# Altium PCB RC_Transmit_PCB.PcbDoc
Units mm, origin at the board's own origin, x right, y up, seen from the top; angles counter-clockwise.
Board outline 152.4 x 101.6 mm, 2 copper layers (Top Layer, Bottom Layer); 31 components, 34 nets, 123 pads, 18 vias.
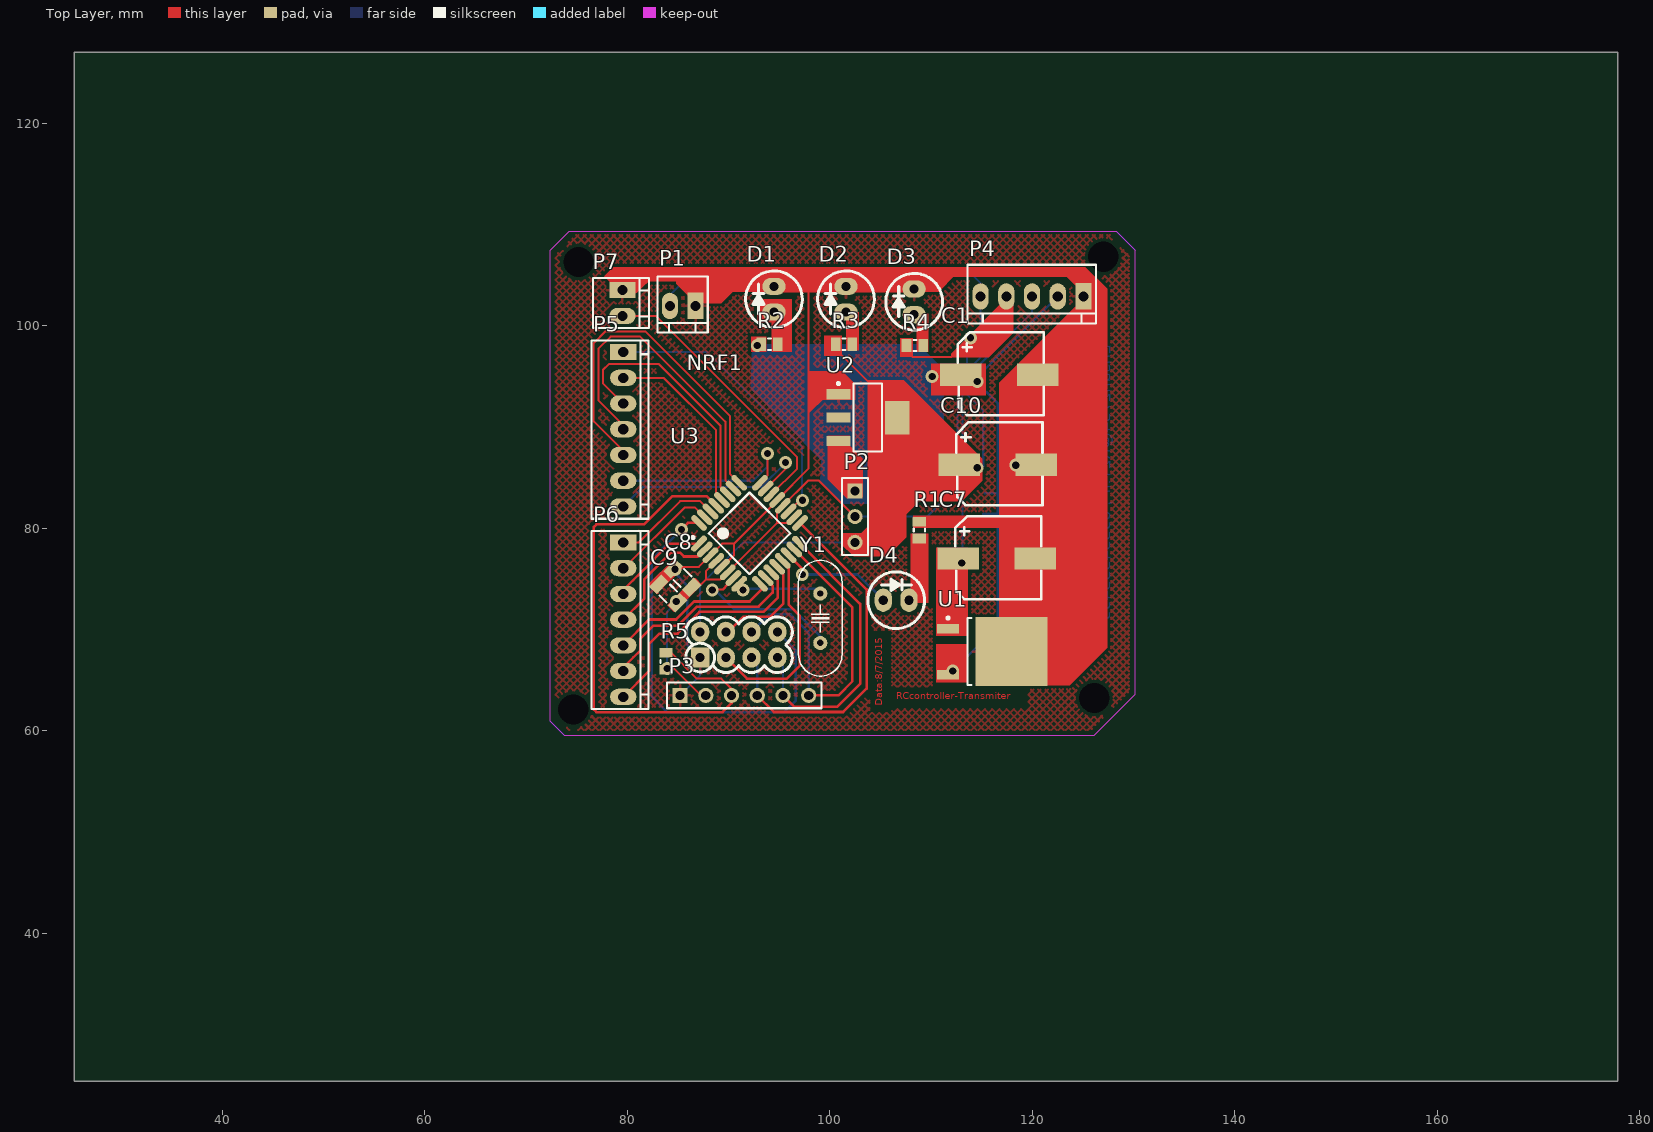
[diagram p0: Top Layer view]
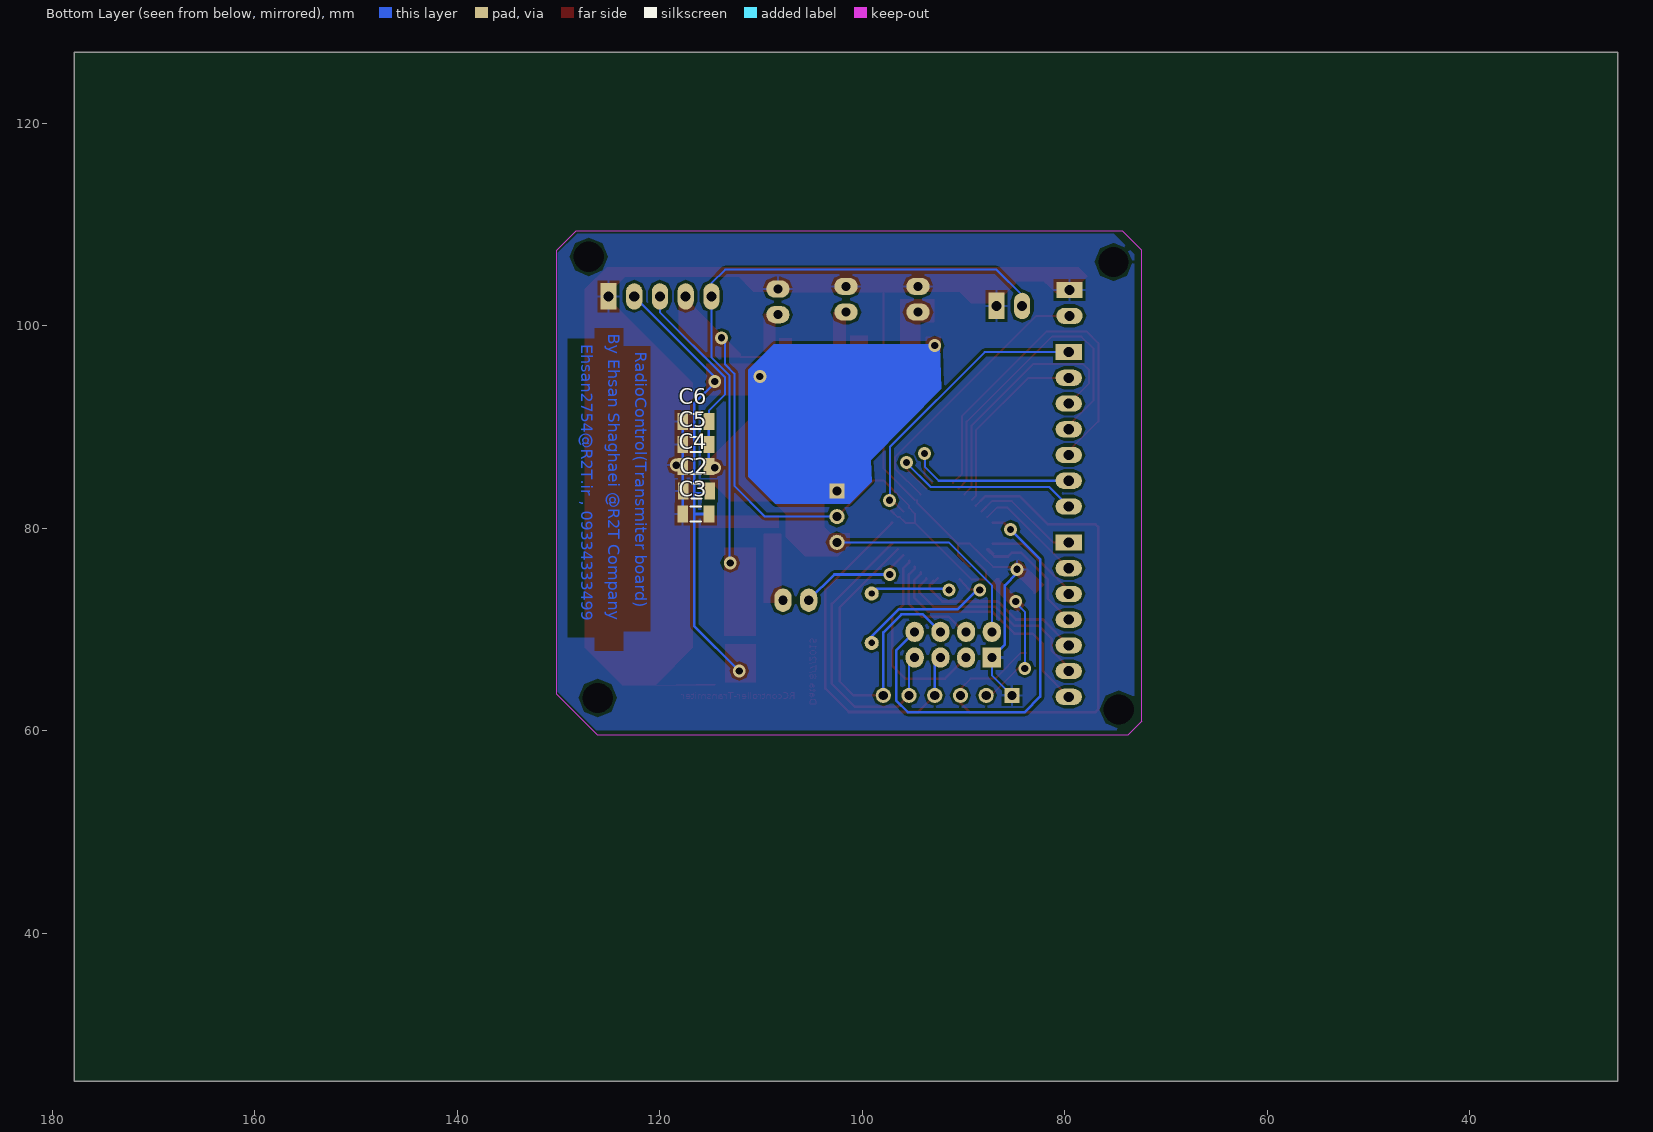
[diagram p1: Bottom Layer view, seen from below]
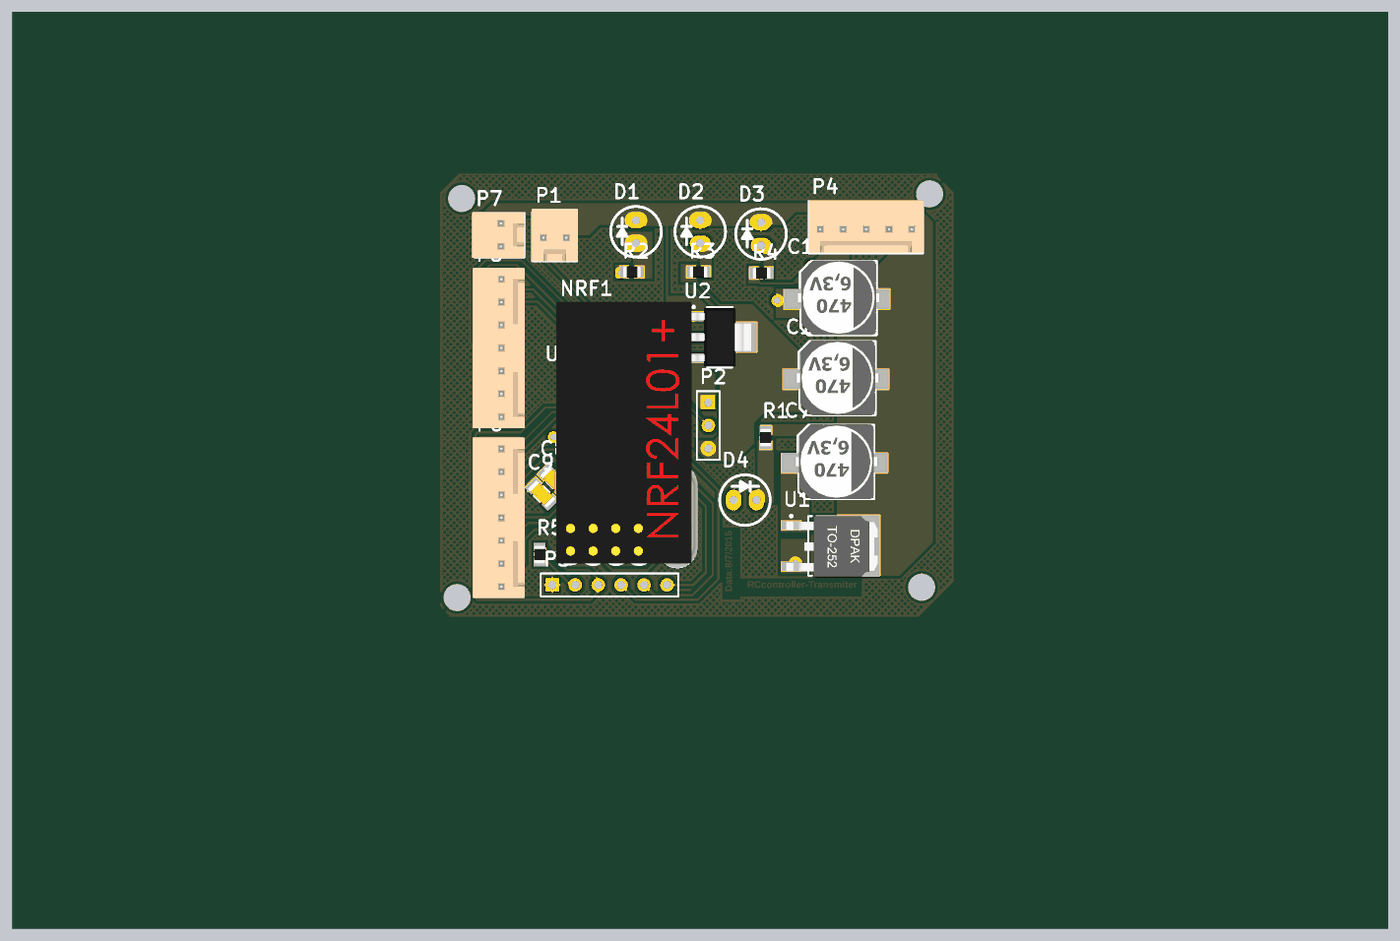
[diagram p2: 3D render of the assembled board from above, using the file's embedded part models]
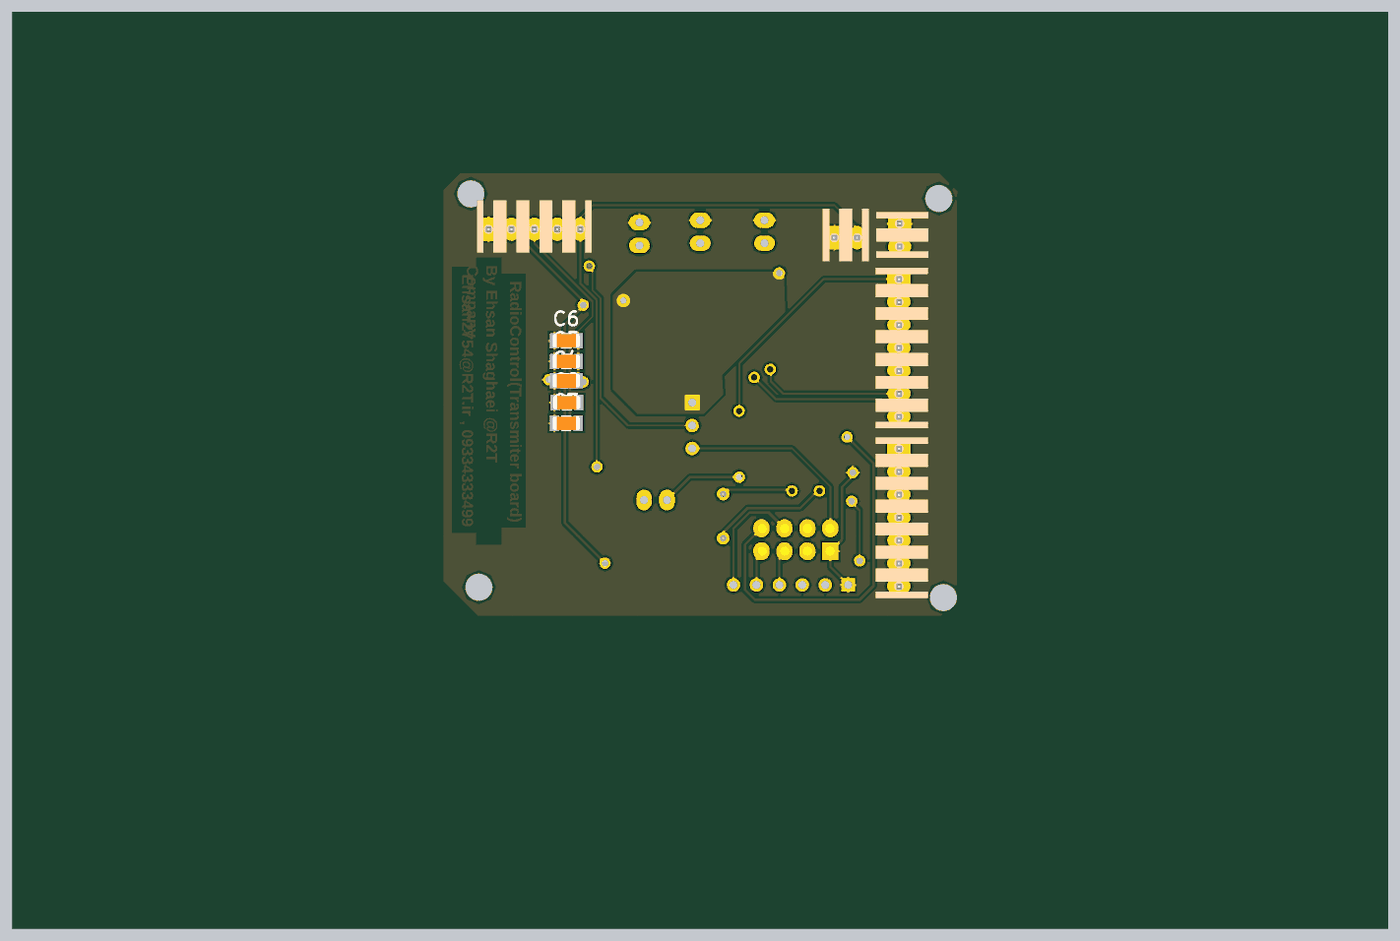
[diagram p3: 3D render of the assembled board from below, using the file's embedded part models]

## Layer stack, top to bottom
Top Solder: solder mask 0.0102, Solder Resist, Dk 3.5
Top Layer: signal copper 0.0356
Dielectric 1: dielectric 0.32, FR-4, Dk 4.8
Bottom Layer: signal copper 0.0356
Bottom Solder: solder mask 0.0102, Solder Resist, Dk 3.5

## Board outline
25.4,25.4 177.8,25.4 177.8,127 25.4,127

## Design rules (kind name [scope] priority, off if disabled: settings)
Clearance [All] p1: gap=0.025
PolygonConnect [All] p1: connectstyle=Relief reliefconductorwidth=0.254 reliefentries=4 polygonreliefangle="90 Angle" airgapwidth=0.254
RoutingVias [All] p1: holewidth=0.711 width=1.27 viastyle="Through Hole" minholewidth=0.711 minwidth=1.27 maxholewidth=0.711 maxwidth=1.27
SolderMaskExpansion [All] p1: expansion=0.102
Width [All] p1: maxlimit=1 minlimit=0.2 preferedwidth=0.5
29 further rules are at their usual default settings.

## Components (designator, comment, footprint, x,y, rotation, side; value= is the part's Value field where it differs from the comment)
C1 "Capacitor Polarized" "Electrolytic Capacitor SMD Dia-8" 113.03,94.869 r0 top
C2 "100nF" SMD_CAP_1206 115.062,83.693 r0 bottom
C3 "100nF" SMD_CAP_1206 115.133,81.407 r0 bottom
C4 "100nF" SMD_CAP_1206 115.133,86.106 r0 bottom
C5 "100nF" SMD_CAP_1206 115.133,88.265 r0 bottom
C6 "100nF" SMD_CAP_1206 115.133,90.551 r0 bottom
C7 "Capacitor Polarized" "Electrolytic Capacitor SMD Dia-8" 112.776,76.708 r0 top
C8 "100nF" SMD_CAP_1206 86.36,74.168 r135 top
C9 "100nF" SMD_CAP_1206 84.963,72.644 r135 top
C10 "Capacitor Polarized" "Electrolytic Capacitor SMD Dia-8" 112.903,85.979 r0 top
D1 "LED" LED_5MM 94.488,101.346 r270 top
D2 "LED" LED_5MM 101.6,101.346 r270 top
D3 "LED" LED_5MM 108.331,101.092 r270 top
D4 "LED" LED_5MM 105.283,72.898 r180 top
NRF1 "NRF24L01+_Module" NRF24L01+_Module 91.567,68.199 r90 top
P1 "LHWR" "Polarized Header 2" 85.471,101.727 r180 top
P2 "Header 3" HDR1X3 102.489,83.693 r270 top
P3 "Programmer" HDR1X6 85.217,63.5 r0 top
P4 "LHWR" "Polarized Header 5" 120.015,102.87 r180 top
P5 "LHWR" "Polarized Header 7" 80.01,89.789 r270 top
P6 "LHWR" "Polarized Header 7" 80.01,70.993 r270 top
P7 "LHWR" "Polarized Header 2" 79.756,102.235 r270 top
R1 "125/100" "RES 0805 (2012X06L)" 108.839,80.645 r270 top
R2 "100/125" "RES 0805 (2012X06L)" 93.218,98.171 r0 top
R3 "100/125" "RES 0805 (2012X06L)" 100.584,98.171 r0 top
R4 "100/125" "RES 0805 (2012X06L)" 107.569,98.044 r0 top
R5 "10k" "RES 0805 (2012X06L)" 83.82,67.691 r270 top
U1 "78M05" DPAK228P972X240-3N 116.078,67.818 r0 top
U2 "LM1117IMP-x.x" MP04A_N 103.759,90.932 r0 top
U3 "ATmega8-16AI" My_32A_M 92.075,79.502 r45 top
Y1 "12mhz" "XTAL Small" 99.06,71.12 r270 top

## Footprints (in the part's own frame and the unit in brackets; to place one, negate y for a bottom-side part, rotate by r counter-clockwise, add the part's x,y. Pads: shape width x height; smd on the part's side, far side on the other; paste and mask are expansions set on the pad)
DPAK228P972X240-3N [mm] "D-PAK, 3-Pads, Body 6.20x6.66mm (max), IPC Medium Density"
  rect 2.15x0.95 smd: 1(-4.4,2.28) 3(-4.4,-2.28)
  rect 7.1x6.8 smd: 2(1.85,0)
  silkscreen extent -4.52,-3.3 -2.1,3.43, body extent -4.95,-3.43 5.15,3.3, height 2.37
"Electrolytic Capacitor SMD Dia-8" [mm] "470uf,6.3v,16v"
  rect 4.1x2.2 smd: 1(-0.1,0.3) 2(7.5,0.3)
  silkscreen extent -0.4,-3.7 8.1,4.5, body extent -0.6,-3.7 8.4,4.6, height 11.9
HDR1X3 [mm] "Connector; Header; 3 Position"
  rect 1.5x1.5 hole 0.9: 1(0,0)
  round 1.5 hole 0.9: 2(2.54,0) 3(5.08,0)
  silkscreen extent -1.27,-1.27 6.35,1.27
HDR1X6 [mm] "Connector; Header; 6 Position"
  rect 1.5x1.5 hole 0.9: 1(0,0)
  round 1.5 hole 0.9: 2(2.54,0) 3(5.08,0) 4(7.62,0) 5(10.16,0) 6(12.7,0)
  silkscreen extent -1.27,-1.27 13.97,1.27
LED_5MM [mm]
  oval 1.7x2.3 hole 0.9: 1(0,0) 2(-2.54,0)
  silkscreen extent -4.07,-2.8 1.53,2.8
MP04A_N [mm] "SOT223, 4-Leads, Body 6.5x3.5mm, Pitch 2.3mm, Lead Span 7mm, IPC Medium Density"
  rect 2.4x1 smd: 1(-2.9,2.3) 2(-2.9,0) 3(-2.9,-2.3)
  rect 2.4x3.3 smd: 4(2.9,0)
  silkscreen extent -3.02,-3.35 1.4,3.47, body extent -3.49,-3.24 3.49,3.24, height 1.64
My_32A_M [mm]
  oct 1.95x0.6 smd: 1(-4.25,2.8)
  oval 1.95x0.6 smd: 2(-4.25,2) 3(-4.25,1.2) 4(-4.25,0.4) 5(-4.25,-0.4) 6(-4.25,-1.2) 7(-4.25,-2) 8(-4.25,-2.8) 17(4.25,-2.8) 18(4.25,-2) 19(4.25,-1.2) 20(4.25,-0.4) 21(4.25,0.4) 22(4.25,1.2) 23(4.25,2) 24(4.25,2.8)
  oval 0.6x1.95 smd: 9(-2.8,-4.25) 10(-2,-4.25) 11(-1.2,-4.25) 12(-0.4,-4.25) 13(0.4,-4.25) 14(1.2,-4.25) 15(2,-4.25) 16(2.8,-4.25) 25(2.8,4.25) 26(2,4.25) 27(1.2,4.25) 28(0.4,4.25) 29(-0.4,4.25) 30(-1.2,4.25) 31(-2,4.25) 32(-2.8,4.25)
  silkscreen extent -4.37,-2.85 2.85,3.77, body extent -3.5,-3.5 3.5,3.5, height 1.2
NRF24L01+_Module [mm]
  rect 2x1.8 hole 0.9: 1(-0.965,4.369)
  oval 2x1.8 hole 0.9: 2(1.575,4.369) 3(-0.965,1.829) 4(1.575,1.829) 5(-0.965,-0.711) 6(1.575,-0.711) 7(-0.965,-3.251) 8(1.575,-3.251)
  silkscreen extent -2.45,-4.73 3.06,5.79, body extent -2.33,-9.08 26.67,5.92, height 9.1
"Polarized Header 2" [mm]
  rect 1.6x2.6 hole 1: 1(-1.28,-0.23)
  oval 1.6x2.6 hole 1: 2(1.26,-0.23)
  silkscreen extent -2.47,-3.15 2.48,2.37, body extent -2.57,-3.43 2.51,2.37, height 10.75
"Polarized Header 5" [mm]
  rect 1.6x2.6 hole 1: 1(-5.035,-0.03)
  oval 1.6x2.6 hole 1: 2(-2.495,-0.03) 3(0.045,-0.03) 4(2.585,-0.03) 5(5.125,-0.03)
  silkscreen extent -6.25,-3.15 6.4,2.65, body extent -6.3,-3.23 6.4,2.57, height 10.75
"Polarized Header 7" [mm]
  rect 1.6x2.6 hole 1: 1(-7.605,-0.405)
  oval 1.6x2.6 hole 1: 2(-5.065,-0.405) 3(-2.525,-0.405) 4(0.015,-0.405) 5(2.555,-0.405) 6(5.095,-0.405) 7(7.635,-0.405)
  silkscreen extent -8.75,-3.52 8.85,2.07, body extent -8.84,-3.62 8.94,2.17, height 10.75
"RES 0805 (2012X06L)" [mm] "Chip Resistor, 2-Leads, Body 2.0x1.3mm, IPC High Density _ (0.100 W)"
  rect 0.95x1.3 smd: 1(0,0) 2(1.65,0)
  silkscreen extent 0.67,-0.55 0.97,0.55, body extent -0.19,-0.63 1.84,0.64, height 0.6
SMD_CAP_1206 [mm]
  rect 1.05x1.7 smd: 1(0,0) 2(2.596,0)
  silkscreen extent 0.8,-0.75 1.8,0.75, body extent -0.22,-0.77 2.82,0.75, height 0.75
"XTAL Small" [mil]
  round 55 hole 25: 1(-96.06,0) 2(96.06,0)
  silkscreen extent -225,-85 225,85, body extent -226,-89 226,89, height 140

## Part data
C2 C3 C4 C5 C6 C8 C9: library part Cap-Bipolar, "Bipolar Capacitor"
P1 P7: library part "2pin LHWR"
P2: "Header, 3-Pin"
P3: library part "Header 6", "Header, 6-Pin"
P4: library part "5pin LHWR"
P5 P6: library part "7pin LHWR"
R1 R2 R3 R4 R5: library part Resistor, "Resistor"
U2: "x.x Volt, 800mA Low-Dropout Linear Regulator, 4-pin SOT-223"
U3: "AVR 8K Bytes of In-System Programmable Flash Memory"
Y1: library part XTAL, "XTAL Crystal"

## Free pads (board coordinates)
  round 1.524 hole 3: 0(127,106.807) 1(75.184,106.299) 2(74.676,62.103) 3(126.111,63.246)

## Via types
v1: diameter 1.27, hole 0.711, Top Layer to Bottom Layer, 18 vias

## Nets (pads, with @x,y where several pads share a name; then routed paths per layer and width w, separated by ;. In a path a pad name is that pad's centre, name@x,y a point inside that pad or via, vN(x,y) a via of type N, cw(c..) or ccw(c..) an arc to the next point about the centre after c; other vN are vias at no path point)
+12: C7.1 P1.2 P4.5 U1.1 | length 69
  Top Layer w0.2: U1.1 111.678,76.01 C7.1@112.64,76.971
  Bottom Layer w0.2: P1.2 84.211,103.007 86.741,105.537 113.538,105.537 114.89,104.185 P4.5 114.89,96.88 113.084,95.074 113.084,76.635 v1(113.03,76.581)
CE: NRF1.3 U3.13 | length 19.7
  Top Layer w0.254: NRF1.3 91.821,65.151 95.758,65.151 97.028,66.421 97.028,71.374 95.956,72.446 95.956,76.019 95.363,76.611 U3.13
CSN: NRF1.4 U3.12 | length 10.7
  Top Layer w0.254: NRF1.4 89.967,69.774 91.44,71.247 94.107,71.247 95.39,72.53 95.39,75.453 94.797,76.046 U3.12
GND: C1.2 C2.2 C3.2 C4.2 C5.2 C6.2 C7.2 C8.2 C9.2 C10.2 D1.2 D2.2 D3.2 NRF1.1 P1.1 P3.1 P4.1 P7.1 R1.1 U1.2 U2.1 U3.3 U3.5 U3.21 | length 214.6
  Top Layer w0.2: C9.2@83.508,74.48 84.905,75.877 85.032,75.877 85.356,76.2 87.076,76.2 U3.3 89.362,78.486 90.541,78.486 ; U3.5 89.422,76.214 90.541,77.333 90.541,78.476 94.591,82.526 U3.21@94.591,82.79 ; U3.21 97.917,85.91 97.917,103.632 ; 97.931,93.232 U2.1 ; R1.1 120.403,80.645 120.53,80.772
  Top Layer w0.254: U1.2 120.276,70.166 C7.2 120.53,77.262 120.53,80.772 C1.2
  Top Layer w0.7: P7.1 80.782,103.515 82.423,105.156 108.585,105.156 ; P1.1 86.751,105.039 ; D1.2@94.742,103.632 97.917,103.632 D3.2 108.585,103.886 108.585,105.156 ; U1.2 126.873,76.763 126.873,103.632 126.111,104.394 ; P4.1 125.05,103.333 126.111,104.394 ; 108.585,105.156 125.349,105.156 126.111,104.394
  Bottom Layer w0.2: P3.1 87.198,65.481 NRF1.1
  Bottom Layer w0.254: v1(84.709,75.946) 84.709,75.565 85.917,74.357 85.917,68.515 NRF1.1 ; C3.2 C4.2 C5.2 C6.2
  other v1: 118.364,86.233
IRQ: NRF1.8 U3.32 | length 42.6
  Top Layer w0.254: v1(85.344,79.883) 85.988,80.527 U3.32
  Bottom Layer w0.254: v1(85.344,79.883) 82.423,76.962 82.423,63.373 83.947,61.849 95.504,61.849 96.647,62.992 96.647,67.945 NRF1.8
MISO: NRF1.7 P3.5 U3.16 | length 29.3
  Top Layer w0.254: P3.5 96.508,62.369 100.723,62.369 102.997,64.643 102.997,72.54 U3.16
  Bottom Layer w0.2: NRF1.7 95.377,66.675 P3.5
MOSI: NRF1.6 P3.6 U3.15 | length 33.6
  Top Layer w0.254: U3.15 102.235,72.17 102.235,64.897 100.838,63.5 P3.6
  Bottom Layer w0.254: NRF1.6 94.005,71.501 96.139,71.501 97.917,69.723 P3.6
NetD1_1: D1.1 R2.2 | length 3.3
  Top Layer w0.2: D1.1 94.868,100.966 R2.2
NetD2_1: D2.1 R3.2 | length 3.4
  Top Layer w0.2: D2.1 102.234,100.712 R3.2
NetD3_1: D3.1 R4.2 | length 3.4
  Top Layer w0.2: D3.1 109.219,100.204 R4.2
NetD4_1: D4.1 U3.14 | length 11.5
  Top Layer w0.254: U3.14 97.282,75.992 v1(97.282,75.438)
  Bottom Layer w0.254: v1(97.282,75.438) 102.743,75.438 D4.1
NetD4_2: D4.2 R1.2 | length 6.5
  Top Layer w0.2: D4.2 108.331,73.406 108.331,78.487 R1.2
NetU3_7: U3.7 Y1.2 | length 15.7
  Top Layer w0.254: v1@88.519,73.787 v1(88.392,73.914) 89.473,73.972 U3.7@90.357,74.956
  Bottom Layer w0.254: v1(88.392,73.914) v1@88.9,73.914 ; v1@88.9,73.66 90.551,72.009 96.349,72.009 99.06,69.298 Y1.2
NetU3_8: U3.8 Y1.1 | length 7.4
  Bottom Layer w0.254: v1(91.44,73.914) 91.313,74.041 Y1.1@98.579,74.041
PC0: P5.7 U3.23 | length 21
  Top Layer w0.2: U3.23 v1@95.931,86.187
  Bottom Layer w0.2: P5.7 81.525,84.074 93.218,84.074 v1(95.631,86.487)
PC1: P5.6 U3.24 | length 19.3
  Top Layer w0.2: U3.24 93.853,85.24 v1(93.853,87.376)
  Bottom Layer w0.2: P5.6 92.441,84.694 93.789,86.042 v1@93.789,87.439
PC2: P5.5 U3.25 | length 36.6
  Top Layer w0.2: P5.5 79.605,87.642 76.689,90.558 76.689,98.279 77.851,99.441 81.788,99.441 90.135,91.094 90.135,85.402 U3.25
PC3: P5.4 U3.26 | length 32.4
  Top Layer w0.2: P5.4 79.605,90.182 77.143,92.644 77.143,97.717 78.359,98.933 81.28,98.933 89.681,90.532 89.681,84.724 U3.26
PC4: P5.3 U3.27 | length 25.6
  Top Layer w0.2: P5.3 77.597,94.322 77.597,95.631 78.206,96.24 83.084,96.24 89.227,90.097 89.227,84.047 U3.27
PC5: P5.2 U3.28 | length 18.4
  Top Layer w0.2: P5.2 83.581,94.854 88.773,89.662 88.773,83.185 U3.28@89.168,82.79
PC6: P5.1 U3.19 | length 28.6
  Top Layer w0.2: U3.19 97.029,82.759 v1(97.297,82.759)
  Bottom Layer w0.2: P5.1 87.899,97.394 97.252,88.041 97.252,82.804 v1(97.297,82.759)
PC7: P7.2 U3.22 | length 27.7
  Top Layer w0.2: P7.2 82.794,100.975 96.774,86.995 96.774,85.898 U3.22
PD0: P6.1 U3.30 | length 10.7
  Top Layer w0.2: P6.1 81.138,78.598 85.217,82.677 87.203,82.677 U3.30
PD1: P6.2 U3.31 | length 10.9
  Top Layer w0.2: P6.2 79.666,76.058 85.65,82.042 86.707,82.042 U3.31
PD3: P6.3 U3.1 | length 9.8
  Top Layer w0.254: P6.3 79.605,73.89 80.592,74.877 80.594,74.877 81.286,75.569 81.286,75.571 84.192,78.477 U3.1
PD4: P6.4 U3.2 | length 13.1
  Top Layer w0.254: P6.4 81.661,73.034 81.661,74.93 84.328,77.597 85.217,77.597 85.598,77.216 86.961,77.216 U3.2 87.487,77.911 U3.2@87.046,77.47
PD5: P6.5 U3.9 | length 17.7
  Top Layer w0.254: P6.5 82.16,70.993 84.836,70.993 86.614,72.771 92.075,72.771 93.345,74.041 93.345,74.422 U3.9@92.964,74.803 ; U3.9@92.56,75.057 U3.9
PD6: P6.6 U3.10 | length 20.6
  Top Layer w0.254: P6.6 79.605,66.27 80.592,67.257 80.594,67.257 81.286,67.949 81.286,69.094 82.55,70.358 84.963,70.358 86.868,72.263 92.964,72.263 94.361,73.66 94.361,74.303 93.666,74.998 U3.10
PD7: P6.7 U3.11 | length 23.6
  Top Layer w0.254: P6.7 82.169,65.922 82.169,68.58 83.185,69.596 84.963,69.596 87.122,71.755 93.472,71.755 94.869,73.152 94.869,74.843 94.232,75.48 U3.11
RES: P3.3 R5.1 U3.29 | length 55.2
  Top Layer w0.2: R5.1 84.328,67.691 86.868,65.151 89.281,65.151 90.297,64.135 P3.3
  Top Layer w0.254: U3.29 87.853,83.158 84.428,83.158 81.661,80.391 76.962,80.391 76.708,80.137 76.708,62.103 76.962,61.849 89.408,61.849 90.297,62.738 P3.3
SCK: NRF1.5 P3.4 U3.17 | length 35.5
  Top Layer w0.254: P3.4 94.476,61.861 101.314,61.861 103.632,64.179 103.632,73.955 U3.17
  Bottom Layer w0.2: NRF1.5 92.837,66.675 P3.4
VCC: C1.1 C2.1 C3.1 P2.1 P4.2 R2.1 U1.3 U2.3 | length 87.1
  Top Layer w0.254: U2.3 100.859,85.323 P2.1
  Bottom Layer w0.254: v1(92.837,98.044) 92.837,93.345 P2.1 107.188,83.693 110.109,86.614 v1(110.109,94.996) ; v1(112.141,65.913) 116.586,70.358 116.586,81.407 ; C3.1 116.586,81.407 ; C2.1@115.316,83.439 116.586,83.439 ; P4.2 114.263,94.653 116.586,92.329 116.586,83.439 ; 116.586,81.407 116.586,83.439
  other v1: 114.554,94.488
VCC(3.3V): C4.1 C5.1 C6.1 C10.1 NRF1.2 P2.3 P4.3 R3.1 U2.4 | length 73.6
  Top Layer w0.2: R3.1 100.584,97.663 106.659,91.588 U2.4 106.659,79.481 105.791,78.613 P2.3 ; 106.74,86.279 C10.1
  Bottom Layer w0.2: NRF1.2 87.198,74.371 91.44,78.613 P2.3 ; C6.1 115.133,91.623 113.538,93.218 113.538,94.886 119.97,101.318 P4.3
  Bottom Layer w0.254: C4.1 C5.1 C6.1
  other v1: 114.554,85.979
VDD: C8.1 C9.1 P2.2 P3.2 P4.4 R4.1 R5.2 U3.4 U3.6 U3.18 U3.20 | length 82.3
  Top Layer w0.2: R5.2@83.947,66.422 84.327,66.422 87.249,63.5 P3.2 ; C9.1@85.344,72.644 85.471,72.644 87.791,74.964 ; U3.4 87.757,75.75 87.757,74.93 89.2,74.93 U3.6 94.797,80.527 ; U3.18@97.155,81.754 U3.18 96.288,81.093 95.722,80.527 94.797,80.527 ; P2.2 98.933,84.709 97.848,84.709 U3.20 95.363,82.018 94.797,81.452 94.797,80.527 ; R4.1 107.569,97.536 108.204,96.901 111.983,96.901 v1(113.888,98.806) 115.316,98.806 117.43,100.92 P4.4
  Bottom Layer w0.2: v1(83.947,66.167) 83.947,71.755 84.836,72.644 v1(84.836,72.771) ; P2.2 109.601,81.153 112.63,84.182 112.63,95.262 113.538,96.17 113.538,98.456 v1(113.888,98.806)
pads on no net: U2.2

## Polygon pours and split planes (outlines as drawn)
GND on Bottom Layer "Top Layer-No Net" (solid, pour order 4): 74.422,59.944 74.549,60.071 126.111,60.071 126.238,60.071 130.048,63.881 130.048,107.061 130.048,107.188 128.143,109.093 75.311,109.093 75.184,109.093 73.025,106.934 73.152,106.807 73.152,61.341 74.295,60.198 74.422,60.071
GND on Top Layer "Top Layer-No Net" (hatched 45Degree grid 0.508 track 0.203, pour order 2): 129.54,107.061 129.54,63.881 125.857,60.198 125.73,60.071 73.914,60.071 73.914,60.198 73.025,61.087 72.898,61.214 72.898,106.68 72.898,106.934 74.93,108.966 127.762,108.966 127.762,108.712 129.54,106.934

## Keep-outs
Keep-Out Layer:
  lines w0.05: 72.39,60.96 72.39,107.442 74.295,109.347 85.598,109.347 128.27,109.347 130.175,107.442 130.175,63.627 126.111,59.563 73.787,59.563 72.39,60.96

## Other copper
Top Layer:
  rectangle net GND: 108.204,80.01 118.237,81.28
  rectangle net NetD4_2: 107.95,72.644 109.728,79.502
  rectangle net +12: 110.49,69.342 113.665,78.105
  rectangle net VCC: 110.49,64.77 113.538,68.58
  rectangle net VCC: 109.982,93.091 115.443,96.266
  rectangle net VCC(3.3V): 99.568,97.282 100.965,98.933
  rectangle net NetD1_1: 94.234,97.409 96.266,101.727
  rectangle net NetD1_1: 92.837,100.33 96.266,102.616
  rectangle net NetD3_1: 108.585,97.409 109.728,101.219
  rectangle net NetD2_1: 101.6,97.536 102.87,101.346
  rectangle net VCC: 92.202,97.409 93.726,98.933
  rectangle net VCC(3.3V): 99.441,97.028 101.219,99.06
  rectangle net VDD: 106.934,96.901 108.204,98.806
  region net GND: 114.427,64.643 114.554,64.516 123.698,64.516 127.381,68.199 127.381,103.632 125.222,105.791 78.613,105.791 77.724,104.902 78.486,104.14 78.486,103.378 80.137,103.378 80.391,103.124 81.661,104.394 84.836,104.394 84.836,104.14 86.995,101.981 87.249,102.235 89.281,102.235 90.424,103.378 110.744,103.378 112.395,105.029 123.444,105.029 123.444,104.775 125.349,102.87 125.222,102.87 116.713,94.361 116.713,68.199 120.396,64.516
  region net VDD: 111.983,96.901 115.697,96.901 118.11,99.314 118.11,102.616 117.729,102.997 111.983,97.251
  region net VCC(3.3V): 107.315,94.615 115.062,86.868 115.062,84.709 113.03,82.677 108.839,82.677 107.569,81.407 107.569,79.121 105.664,77.216 102.362,77.216 101.092,78.486 101.219,78.613 101.219,79.502 103.124,79.502 103.759,80.137 103.759,94.615
  region net VCC: 101.981,89.154 101.981,88.138 103.251,86.868 103.251,83.058 101.854,83.058 101.727,82.931 99.822,84.836 99.822,89.154
  region net GND: 97.917,92.71 97.917,95.504 101.219,95.504 102.489,94.234 102.489,92.71
  region net GND: 99.441,92.837 98.044,91.44 97.917,91.44 97.917,92.837 98.044,92.964 99.441,92.964
  region net VDD: 84.709,71.755 87.376,74.422 86.741,75.057 86.487,75.057 86.487,74.93 83.947,72.39 84.582,71.755
  region net GND: 85.471,76.073 83.058,73.66 83.058,73.533 82.931,73.533 82.042,74.422 84.582,76.962 84.594,76.962 85.356,76.2
  text "RCcontroller-Transmiter" at 106.553,62.865 h1.2
  text "Data:8/7/2015" at 105.41,62.484 h1.2 r90
Bottom Layer:
  region net VCC: 92.329,98.044 92.964,98.171 108.712,98.171 111.252,95.631 111.252,85.09 108.585,82.423 101.219,82.423 99.06,84.582 99.173,86.736 92.187,93.779
  text "By Ehsan Shaghaei @R2T Company" at 125.476,99.187 h2 r90
  text "Ehsan2754@R2T.ir , 09334333499" at 128.143,98.171 h2 r90
  text "RadioControl(Transmiter board)" at 122.809,97.409 h2 r90

## Silkscreen, mask and mechanical layers (free items; w line width, h text height)
Mechanical 1:
  lines w0.05: 75.946,60.198 125.73,60.198 129.54,64.008 129.54,107.188 127.762,108.966 74.93,108.966 72.898,106.934 72.898,61.087 73.787,60.198 76.454,60.198